# EAGLE board dyiofix_left (EAGLE 7.1.0)
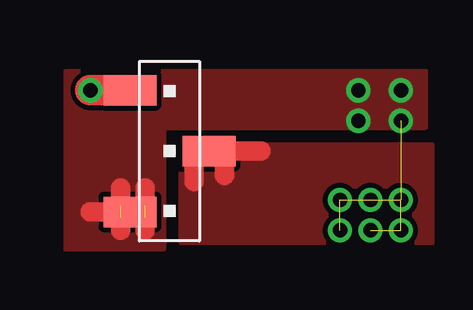
[diagram p0: board, top side]

No outline drawn. Coordinates in mm, seen from the top.
Copper layers (1*16): Top 0.035mm / dielectric 1.5mm / Bottom 0.035mm
Design rules "default": minimum track width 10mil, minimum drill 24mil, track to track 8mil, track to pad 8mil, pad to pad 8mil, via to via 8mil, smd to smd 8mil, copper to edge 40mil, drill to drill 8mil, minimum pad ring 10mil, minimum via ring 8mil, stop-mask expansion 4mil, vias tented up to drill 0mil, thermal gap 10mil

## Footprints (pad centres in the part's own frame; a part is rotated, then mirrored left to right if it is on the bottom)
HEADER = smd 1.27 x 2.2: P$1 -2.54,1.65; P$2 0,-1.65; P$3 2.54,1.65

## Placement (x,y rotation side)
E$1  [HEADER]  5.59,4.57 90 top

## Library data of the parts
E$1 = 3pinh

## Tracks (layer width: path | path; a pad name or v marks a point on that pad's centre or on a via)
5V  (via drill 0.6)
  Top 1.27: v2.29,7.11 4.32,7.11
RAIL
  Top 0.813: 7.87,3.56 7.87,4.57 9.4,4.57 | 6.6,4.57 6.6,3.3
  pour Top: 6.1,4.83 16.51,4.83 16.51,0.76 6.1,0.76
RAW  (via drill 0.6)  (8 unrouted)
  Top 0.813: 4.57,2.29 4.57,3.05 | 3.56,2.29 3.56,3.05 | 3.56,1.78 3.56,1.27 | 4.57,1.78 4.57,1.27 | 3.05,2.03 2.29,2.03
  other vias: 13.46,5.84 15.24,7.11 12.7,2.54 12.7,1.27 13.97,1.27 15.24,1.27 13.97,2.54 15.24,2.54 15.24,5.84 13.46,7.11
  pour Top: 16.26,7.87 1.27,7.87 1.27,0.51 5.33,0.51 5.33,5.59 16.26,5.59